# EAGLE board pc_healthypi_move_bottom_pcb (EAGLE 9.6.2)
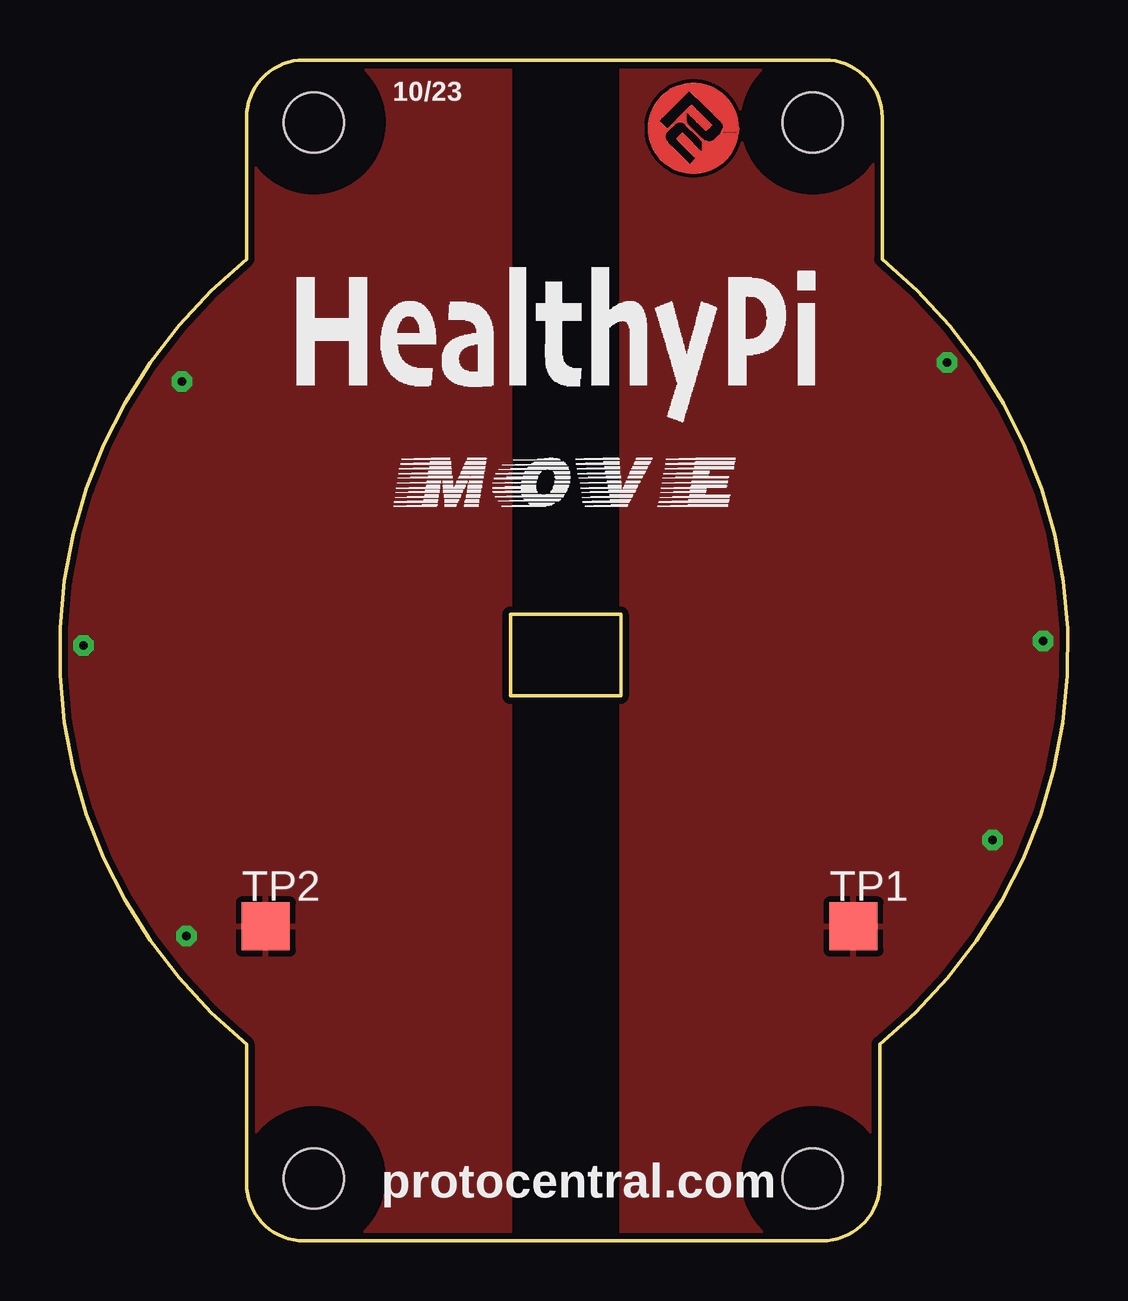
[diagram p0: board, top side]
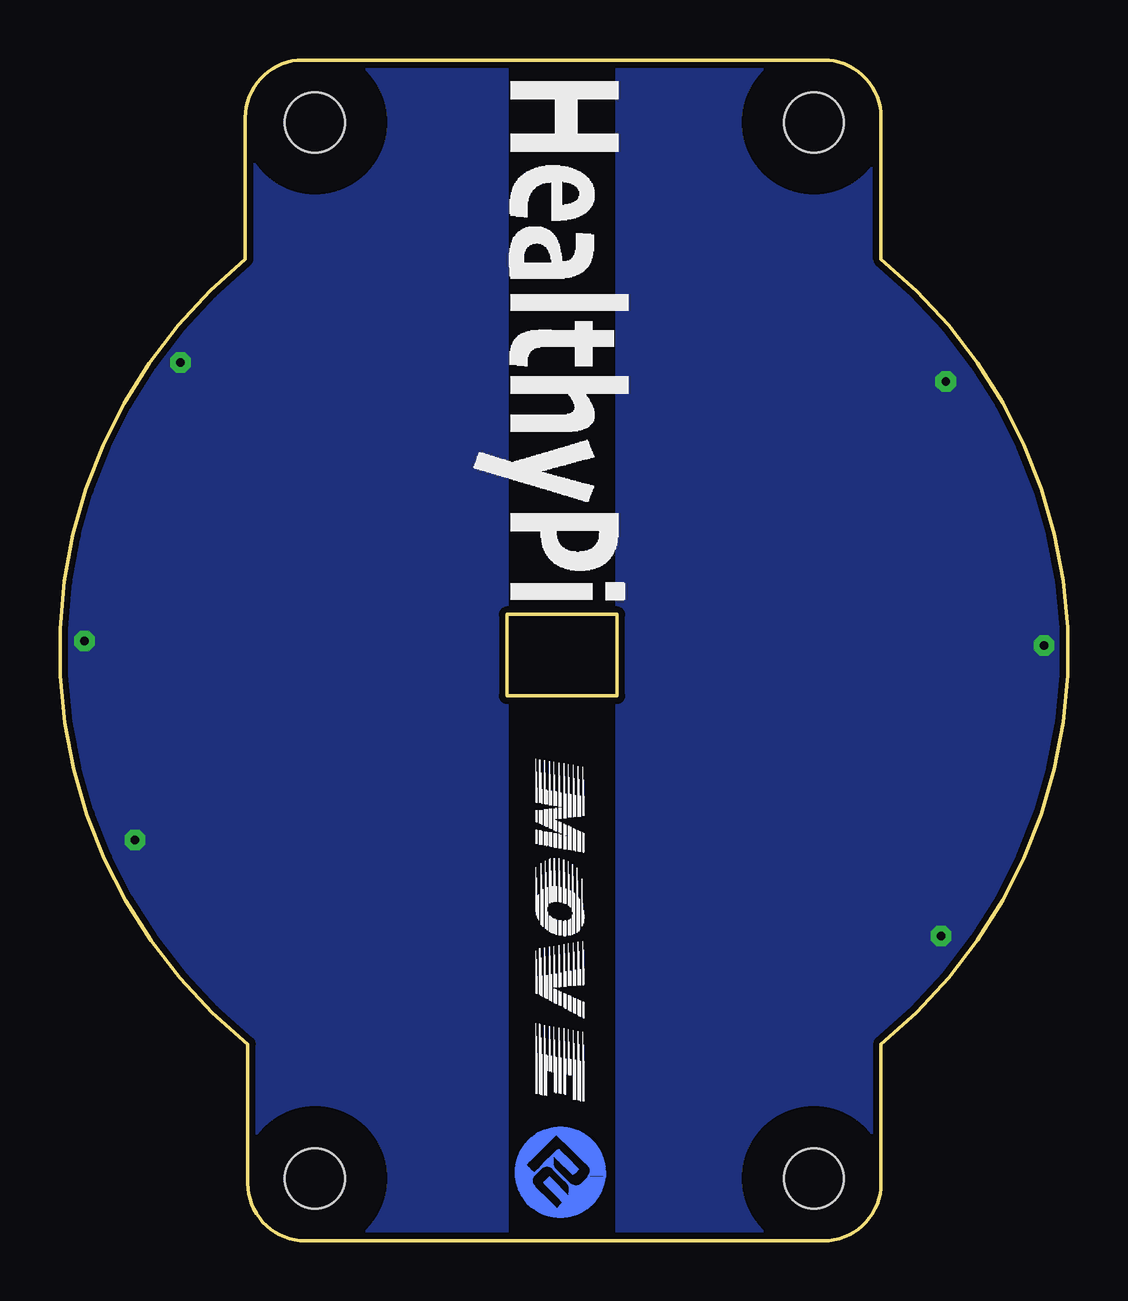
[diagram p1: board, bottom side, seen from below]

Size 42 x 49.2 mm. Coordinates in mm from the lower left corner, seen from the top.
Outline: 10.18,49.2 31.88,49.2 arc-90 34.28,46.8 34.28,40.9 arc-102 34.18,8.2 34.18,2.4 arc-90 31.78,0 10.18,0 arc-90 7.78,2.4 7.78,8.2 arc-102 7.78,40.9 7.78,46.8 arc-90 10.18,49.2
Outline: 18.78,26.1 23.38,26.1 23.38,22.7 18.78,22.7 18.78,26.1
Copper layers (1*16): Top 0.035mm / dielectric 1.5mm / Bottom 0.035mm
Design rules "Circuitects-Rules *": minimum track width 6mil, minimum drill 0.3mm, track to track 6mil, track to pad 6mil, pad to pad 6mil, via to via 6mil, smd to smd 6mil, copper to edge 10mil, drill to drill 8mil, minimum pad ring 12mil, minimum via ring 10mil, stop-mask expansion 4mil, vias tented up to drill 25mil, thermal gap 10mil
Net classes: 2 Clock: width 0.089 mm, clearance 0.178 mm
Holes 2.5 mm at 31.38,46.6 10.58,2.6 10.58,46.6 31.38,2.6
tRestrict: area 28.4,43.6 to 34.4,49.6; area 7.6,-0.4 to 13.6,5.6; area 28.4,-0.4 to 34.4,5.6; area 7.6,43.6 to 13.6,49.6
bRestrict: area 7.6,-0.4 to 13.6,5.6; area 28.4,-0.4 to 34.4,5.6; area 28.4,43.6 to 34.4,49.6; area 7.6,43.6 to 13.6,49.6

## Footprints (pad centres in the part's own frame; a part is rotated, then mirrored left to right if it is on the bottom)
TP20SQ = smd 2 x 2: TP 0,0

## Placement (x,y rotation side)
TP1  TPSQTP20SQ  [TP20SQ]  33.08,13.1 0 top
TP2  TPSQTP20SQ  [TP20SQ]  8.58,13.1 0 top
U$1  [PCROUNDLOGO_GOLD]  23.58,44.1 0 top
U$2  [HEALTHYPI_MOVE_LOGO]  9.88,30.8 0 top
U$3  [HEALTHYPI_MOVE_LOGO_1]  13.08,28 0 top
U$4  [PCROUNDLOGO_GOLD]  23.98,0.6 0 bottom
U$5  [HEALTHYPI_MOVE_LOGO]  28.08,48.3 270 bottom
U$6  [HEALTHYPI_MOVE_LOGO_1]  24.78,20.9 270 bottom

## Library data of the parts
TP1 TP2 = testpad
U$1-U$6 = circuitects

## Nets
PAD1: TP1.TP
PAD2: TP2.TP

## Tracks (layer width: path | path; a pad name or v marks a point on that pad's centre or on a via)
PAD1  (via drill 0.35)
  other vias: 36.98,36.6 38.88,16.7 40.98,25
  pour Bottom: 23.38,49.5 41.98,49.5 41.98,-0.5 23.38,-0.5
  pour Top: 23.38,-0.5 42.08,-0.5 42.08,49.4 23.38,49.4
PAD2  (via drill 0.35)
  other vias: 5.28,12.7 5.08,35.8 0.98,24.8
  pour Bottom: -0.27,-0.37 18.78,-0.37 18.78,49.38 -0.27,49.38
  pour Top: -0.22,-0.4 18.78,-0.4 18.78,49.3 -0.22,49.3

## Text on the board
tPlace: 10/23 | protocentral.com